# Altium PCB PCB2.PcbDoc
Units mm, origin at the board's own origin, x right, y up, seen from the top; angles counter-clockwise.
Board outline 32 x 57 mm, 2 copper layers (Top Layer, Bottom Layer), stack 1.671 mm thick; 11 components, 11 nets, 62 pads, 57 vias.
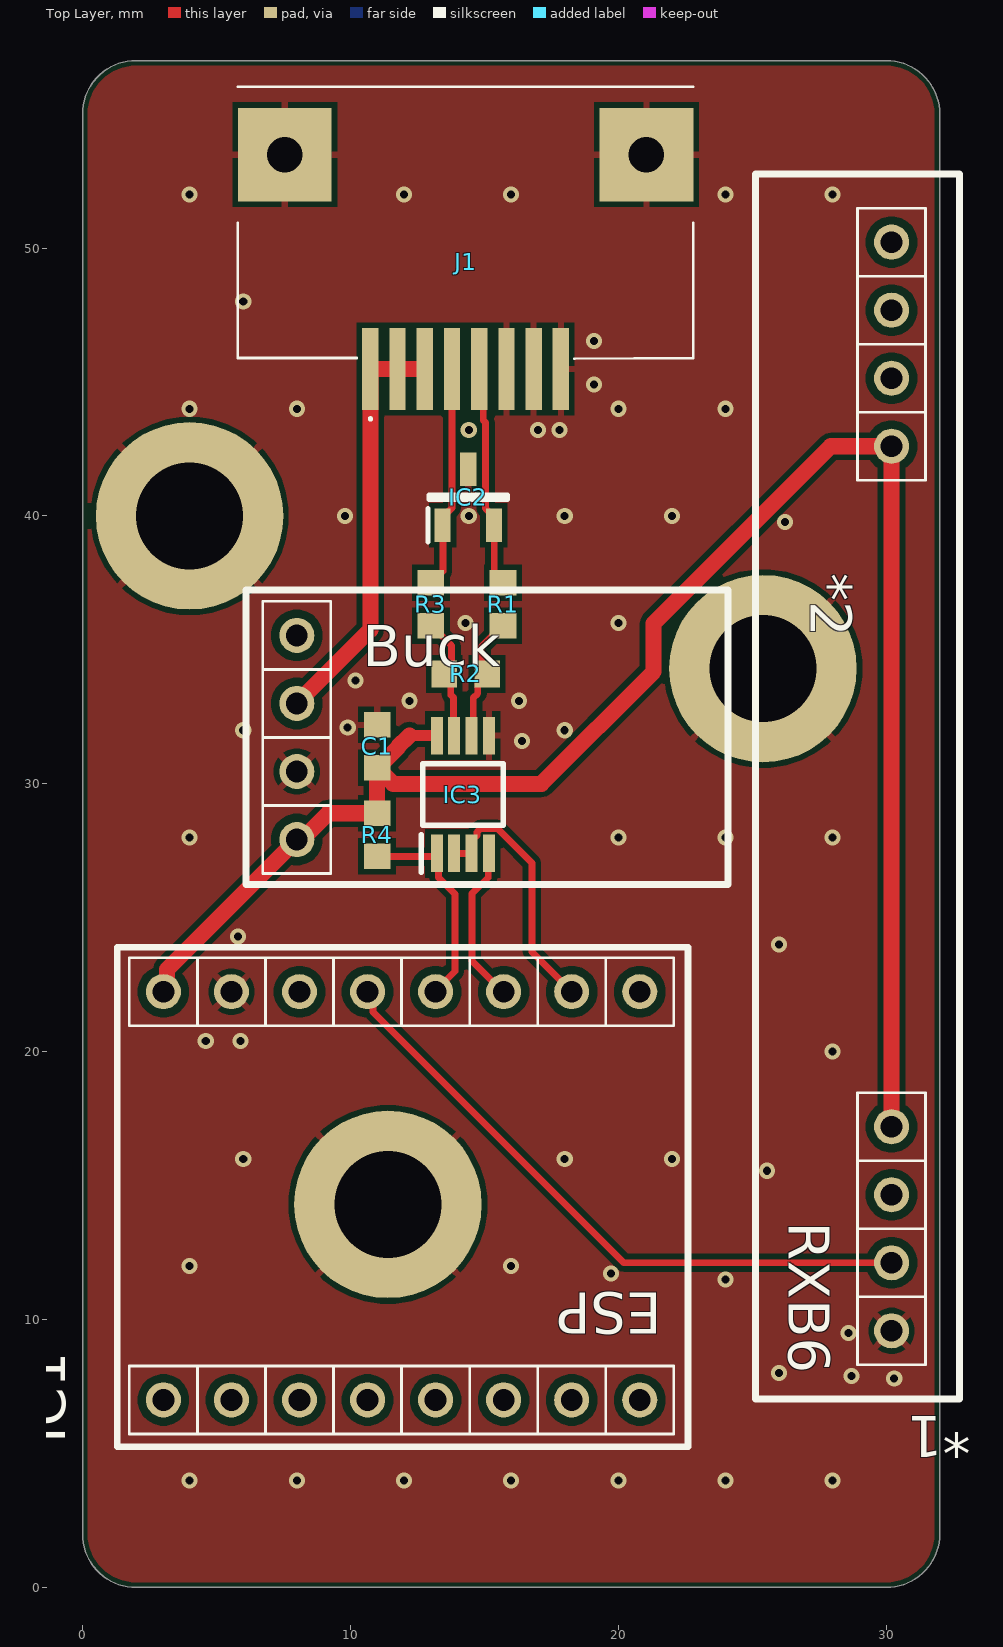
[diagram p0: Top Layer view]
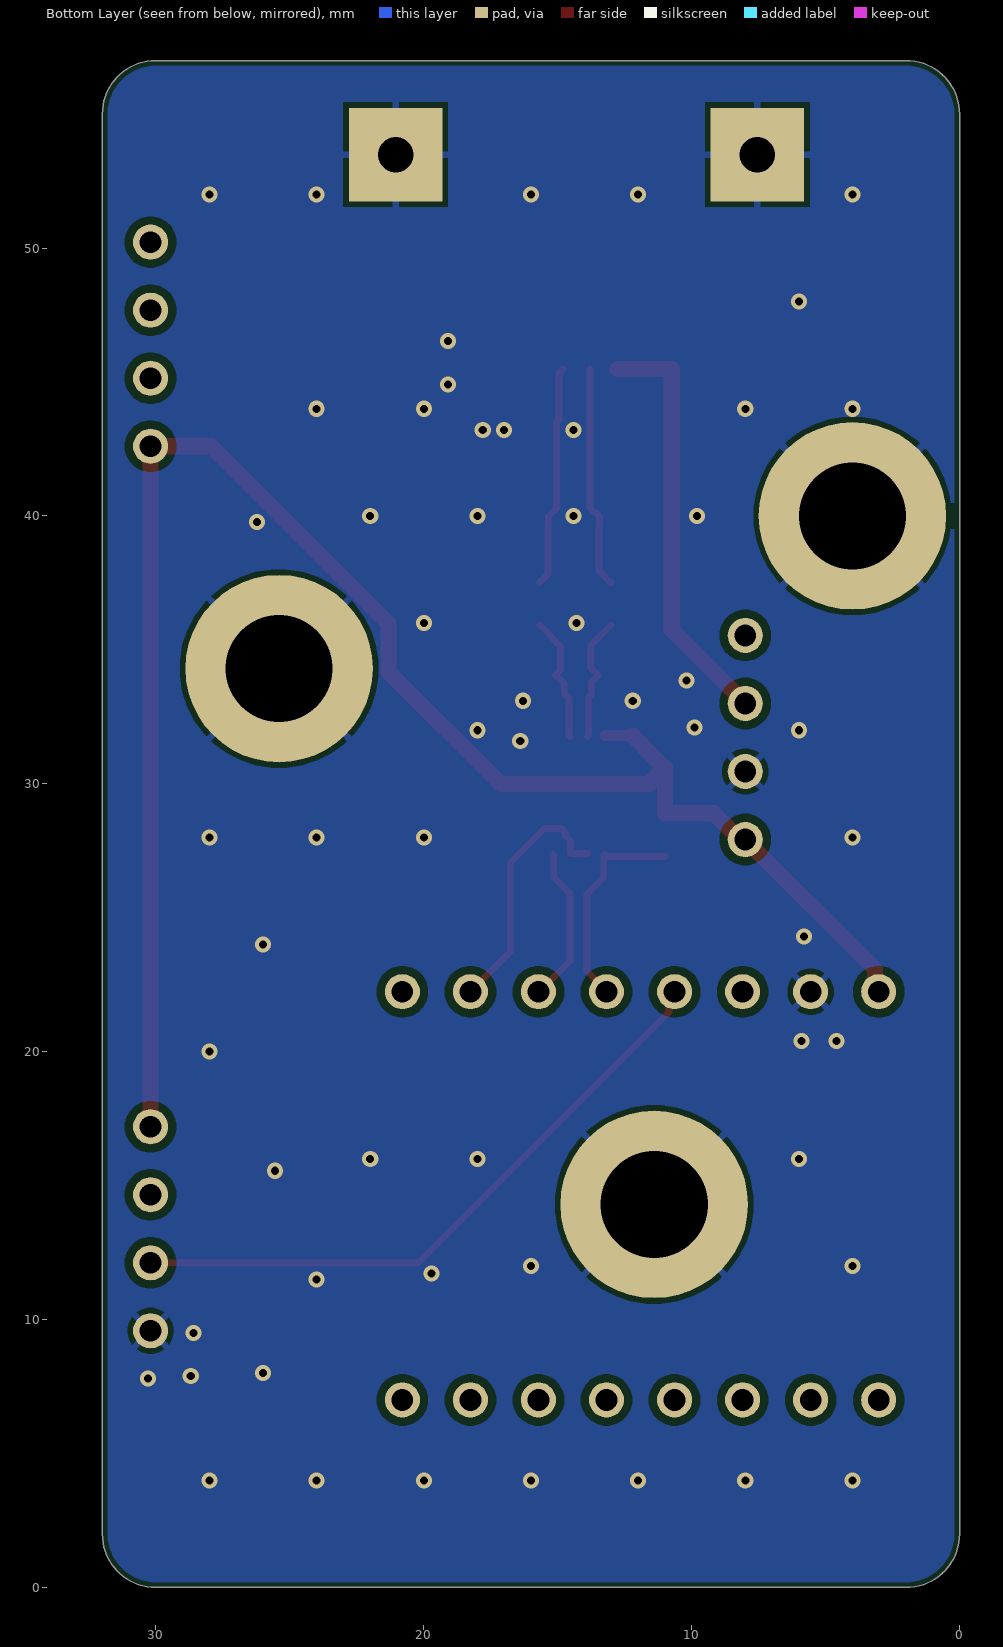
[diagram p1: Bottom Layer view, seen from below]
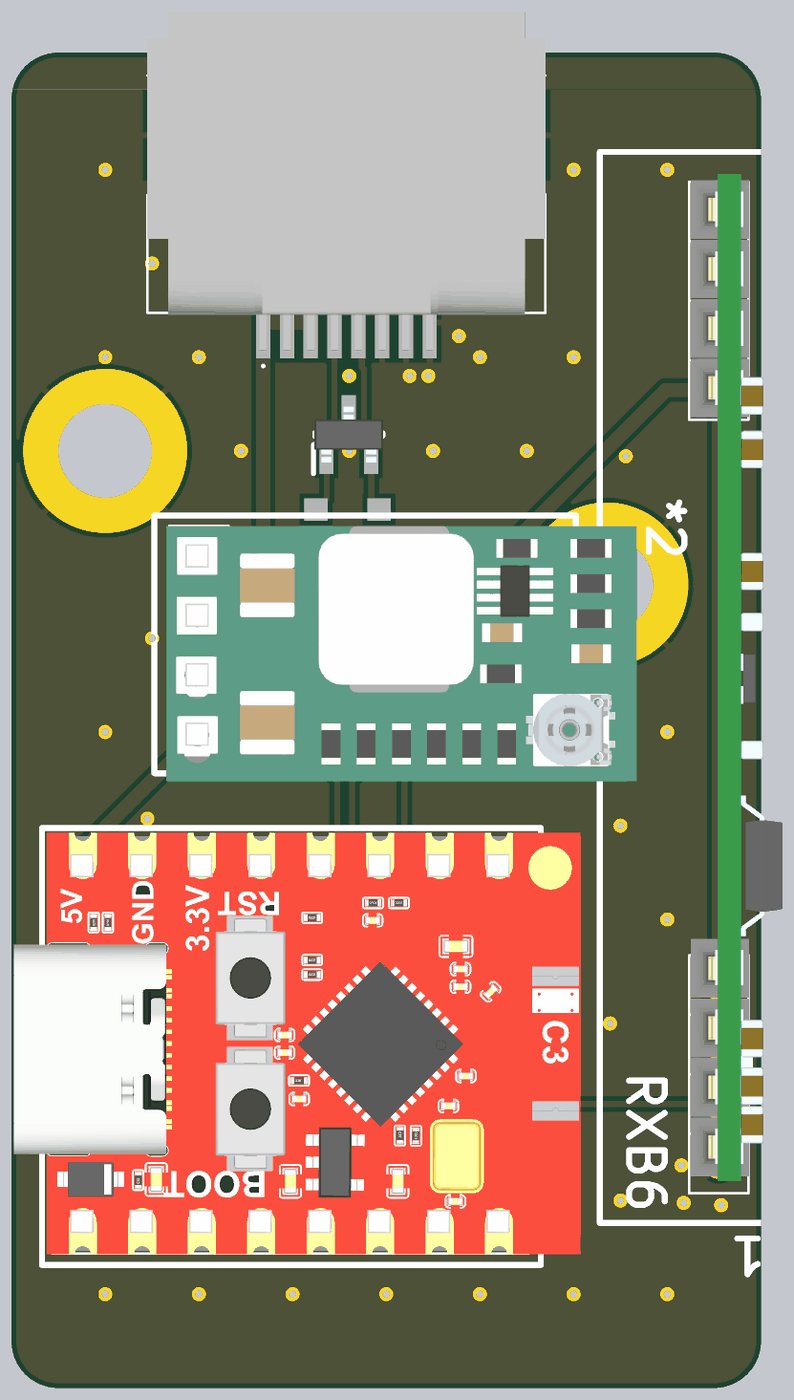
[diagram p2: 3D render of the assembled board from above, using the file's embedded part models]

## Layer stack, top to bottom
Top Solder: solder mask 0.0102, Solder Resist, Dk 3.5
Top Layer: signal copper 0.0356
Dielectric 1: dielectric 1.6, FR-4, Dk 4.8
Bottom Layer: signal copper 0.0356
Bottom Solder: solder mask 0.0102, Solder Resist, Dk 3.5

## Board outline
2,0 30,0 ccw(c30,2) 32,2 32,55 ccw(c30,55) 30,57 2,57 ccw(c2,55) 0,55 0,2 ccw(c2,2)

## Design rules (kind name [scope] priority, off if disabled: settings)
BoardOutlineClearance [All] p1: gap=0.2 ignorepadtopadclearanceinfootprint=FALSE except(0: Text-OutlineEdge Text-CavityEdge Text-CutoutEdge Text-SplitBarrior Text-SplitContinuation)
Clearance [All] p1: gap=0.2 ignorepadtopadclearanceinfootprint=FALSE except(0.1: Arc-SMDPad Track-SMDPad; 0.15: Arc-Arc Arc-Track Arc-Text Track-Track Track-Text SMDPad-SMDPad SMDPad-Text THPad-Text Via-Text Fill-Text Poly-Text Region-Text Text-Text; 0.28: Arc-THPad Track-THPad SMDPad-THPad; 0.3: THPad-THPad THPad-Via THPad-Fill THPad-Poly THPad-Region)
DiffPairsRouting [All] p1: maxlimit=0.4 minlimit=0.2 mostfreqgap=0.3 toplayer_minwidth=0.2 toplayer_maxwidth=0.4 toplayer_prefwidth=0.3 bottomlayer_minwidth=0.2 bottomlayer_maxwidth=0.4 bottomlayer_prefwidth=0.3 maxuncoupledlength=8
Height [All] p1: minheight=0 maxheight=30 prefheight=12.7
HoleSize [All] p1: absolutevalues=TRUE maxlimit=10 minlimit=0.15 maxpercent=80.000 minpercent=20.000
HoleToHoleClearance [All] p1: gap=0.45 allowstackedmicrovias=TRUE
MinimumAnnularRing [All] p1: minimumring=0.15
MinimumSolderMaskSliver [All] p1: minsoldermaskwidth=0.1
PlaneClearance [All] p1: clearance=0.2
PlaneConnect [All] p1: planeconnectstyle=Relief reliefexpansion=0.25 reliefentries=4 reliefconductorwidth=0.25 reliefairgap=0.2
PolygonConnect [All] p1: thpad.connectstyle=Relief thpad.reliefconductorwidth=0.25 thpad.reliefentries=4 thpad.polygonreliefangle="90 Angle" thpad.airgapwidth=0.2 thpad.conductorbypadedge=TRUE thpad.mindistance=0.381 thpad.enablemindistance=FALSE smdpad.connectstyle=Relief smdpad.reliefconductorwidth=0.25 smdpad.reliefentries=4 smdpad.polygonreliefangle="90 Angle" smdpad.airgapwidth=0.2 smdpad.conductorbypadedge=TRUE smdpad.mindistance=0.381 smdpad.enablemindistance=FALSE via.connectstyle=Direct via.reliefconductorwidth=0.25 via.reliefentries=4 via.polygonreliefangle="90 Angle" via.airgapwidth=0.2
RoutingVias [All] p1: holewidth=0.4 width=0.6 viastyle="Through Hole" minholewidth=0.15 minwidth=0.25 maxholewidth=6.3 maxwidth=1
SilkToSilkClearance [All] p1: silktosilkclearance=0
SilkToSolderMaskClearance [IsPad] p1: minsilkscreentomaskgap=0.1 clearancetoexposedcopper=TRUE
SolderMaskExpansion [All] p1: expansion=0 istentingtop=FALSE
SupplyNets "Schematic Supply Nets_3" [InNet('+3V3')] p1: voltage=0.000
SupplyNets "Schematic Supply Nets_2" [InNet('+12')] p2: voltage=0.000
SupplyNets "Schematic Supply Nets_1" [InNet('GND')] p3: voltage=0.000
UnRoutedNet [All] p1: checkbadconnections=TRUE
ViasUnderSMD [All] p1: allowed=TRUE
Width [All] p1: maxlimit=5 minlimit=0.15 preferedwidth=0.254
20 further rules are at their usual default settings.

## Components (designator, comment, footprint, x,y, rotation, side; value= is the part's Value field where it differs from the comment)
*1 "RXB6" RXB6 30.2,17.2 r270 top
*2 "Buck-Module" Buck-Module 8,35.54 r270 top
C1 "100nF/50V" Resistor 11,31.4 r90 top
IC1 "ESP32-C3-supermini" Esp32Module 20.8,7 r90 top
IC2 "NUP2105LT1G" SOT96P237X111-3N 14.4,40.7 r90 top
IC3 "SN65HVD72DGKR" SOP65P490X110-8N 14.2,29.6 r90 top
J1 "5406721-1" 54067211 14.3,49.8 r180 top
R1 "10" Resistor 15.7,36.7 r90 top
R2 "120" Resistor 14.3,34.1 r0 top
R3 "10" Resistor 13,36.7 r90 top
R4 "10k" Resistor 11,28.1 r90 top

## Footprints (in the part's own frame and the unit in brackets; to place one, negate y for a bottom-side part, rotate by r counter-clockwise, add the part's x,y. Pads: shape width x height; smd on the part's side, far side on the other; paste and mask are expansions set on the pad)
54067211 [mm]
  rect 0.61x3.05 smd: 1(3.556,4.315) 2(2.54,4.315) 3(1.524,4.315) 4(0.508,4.315) 5(-0.508,4.315) 6(-1.524,4.315) 7(-2.54,4.315) 8(-3.556,4.315)
  rect 3.5x3.5 hole 1.32: 9(-6.75,-3.685) 10(6.75,-3.685)
  silkscreen extent -8.5,-6.22 8.5,6.22, body extent -8.5,-8.96 8.5,5.51, height 12.44
Buck-Module [mm]
  round 1.31 hole 0.81: 1(0,0) 2(2.54,0) 3(5.08,0) 4(7.62,0)
  silkscreen extent -1.7,-1.9 9.3,16.1, body extent -1.25,-1.4 9.65,18.69, height 16.12
Esp32Module [mm]
  round 1.31 hole 0.81: 0(15.24,0) 1(15.24,2.54) 2(15.24,5.08) 3(15.24,7.62) 4(15.24,10.16) 5(0,17.78) 6(0,15.24) 7(0,12.7) 8(0,10.16) 9(0,7.62) 10(0,5.08) 11(15.24,17.78) 12(15.24,15.24) 13(15.24,12.7) 20(0,2.54) 21(0,0)
  silkscreen extent -1.75,-1.8 16.9,19.5, body extent -1.3,-3.5 16.7,20.7, height 15.36
Resistor [mm]
  rect 0.95x1 smd: 1(-0.8,0) 2(0.8,0)
  body extent -0.8,-0.4 0.8,0.4, height 0.25
RXB6 [mm]
  round 1.31 hole 0.81: 1(-33.02,0) 2(-30.48,0) 3(-27.94,0) 4(-25.4,0) 5(0,0) 6(5.08,0) 7(2.54,0) 8(7.62,0)
  silkscreen extent -35.56,-5.08 10.16,2.54, body extent -34.62,-1.2 8.38,2.7, height 20.68
SOP65P490X110-8N [mm]
  rect 1.4x0.45 smd: 1(-2.2,0.975) 2(-2.2,0.325) 3(-2.2,-0.325) 4(-2.2,-0.975) 5(2.2,-0.975) 6(2.2,-0.325) 7(2.2,0.325) 8(2.2,0.975)
  silkscreen extent -2.9,-1.5 1.15,1.55, body extent -2.45,-1.5 2.45,1.5, height 1.1
SOT96P237X111-3N [mm]
  rect 1.25x0.6 smd: 1(-1.05,0.955) 2(-1.05,-0.955) 3(1.05,0)
  silkscreen extent -1.68,-1.46 0.08,1.51, body extent -1.18,-1.46 1.18,1.46, height 1.11

## Part data
C1: library part "0603 cap"
IC2: "Integrated Circuit", Manufacturer_Name=onsemi, Mouser Part Number=863-NUP2105LT1G, Arrow Part Number=NUP2105LT1G, Arrow Price/Stock=https://www.arrow.com/en/products/nup2105lt1g/on-semiconductor?utm_currency=USD&region=europe, Datasheet Link=https://www.onsemi.com/pub/Collateral/NUP2105L-D.PDF, Height=1.11mm, Manufacturer_Part_Number=NUP2105LT1G, Mouser Price/Stock=https://www.mouser.co.uk/ProductDetail/onsemi/NUP2105LT1G?qs=ZXBb0xZ9WeDHmiHN%252BYKtYA%3D%3D
IC3: library part SN65HVD3085EDGKRG4, "Integrated Circuit", Manufacturer_Name="Texas Instruments", Datasheet Link=http://www.ti.com/lit/ds/symlink/sn65hvd3082e.pdf, Height=1.1mm, Manufacturer_Part_Number=SN65HVD3085EDGKRG4
J1: "Connector", Manufacturer_Name="TE Connectivity", Mouser Part Number=571-5406721-1, Arrow Part Number=5406721-1, Arrow Price/Stock=https://www.arrow.com/en/products/5406721-1/te-connectivity?region=nac, Datasheet Link=https://www.te.com/commerce/DocumentDelivery/DDEController?Action=srchrtrv&DocNm=82066_Mod_Jacks_and_MRJ21_Prod_-_Single&DocType=Catalog%20Section&DocLang=English&PartCntxt=5406721-1&DocFormat=pdf, Height=12mm, Manufacturer_Part_Number=5406721-1, Mouser Price/Stock=https://www.mouser.co.uk/ProductDetail/TE-Connectivity-AMP/5406721-1?qs=dJbzCyn%252BCFbR42PHIn9ZjQ%3D%3D
R1 R2 R3 R4: library part Resistor

## Free pads (board coordinates)
  round 7 hole 4 unplated paste-2539.97 mask-2539.97: 9(4,40) 9(11.4,14.3) 9(25.4,34.3)

## Via types
v1: diameter 0.6, hole 0.3, Top Layer to Bottom Layer, 57 vias

## Nets (pads, with @x,y where several pads share a name; then routed paths per layer and width w, separated by ;. In a path a pad name is that pad's centre, name@x,y a point inside that pad or via, vN(x,y) a via of type N, cw(c..) or ccw(c..) an arc to the next point about the centre after c; other vN are vias at no path point)
433_data: *1.6 IC1.4 | length 24.1
  Top Layer w0.254: IC1.4 10.842,22.038 10.842,21.485 20.207,12.12 *1.6
+3V3: *1.4 *1.5 *2.4 C1.1 IC1.11 IC3.8 R4.2 | length 66.7
  Top Layer w0.4: 12.2,31.8 IC3.8
  Top Layer w0.6: IC1.11 3.156,22.376 3.156,23.076 *2.4 8.192,27.92 9.172,28.9 R4.2 C1.1 C1.1@11.025,30.6 ; 12.2,31.8 11.776,31.376 11.776,31.351 C1.1@11.025,30.6 ; *1.5 *1.4 27.93,42.6 21.32,35.99 21.32,34.189 17.131,30 11.6,30 11.2,30.4 11.2,30.425 C1.1@11.025,30.6
+12: *2.2 J1.1 J1.2 J1.3 | length 15.7
  Top Layer w0.6: *2.2 10.744,35.744 J1.1 J1.2 J1.3
A: IC2.2 J1.5 R1.2 | length 8.3
  Top Layer w0.254: J1.5 14.958,45.335 14.958,43.579 15.046,43.49 15.046,40.284 15.355,39.975 IC2.2 ; IC2.2@15.368,39.606 15.368,37.834 R1.2@15.683,37.519
B: IC2.1 J1.4 R3.2 | length 8.3
  Top Layer w0.254: R3.2@13.016,37.519 13.041,37.519 13.458,37.936 IC2.1@13.458,39.606 ; IC2.1 13.445,39.975 13.618,40.148 13.643,40.148 13.792,40.297 J1.4
GND: *1.8 *2.3 C1.2 IC1.12 IC2.3 IC3.5 J1.6 J1.7 J1.8 J1.9 J1.10 pad.9
  other v1: 4,4 8,4 12,4 16,4 20,4 24,4 28,4 30.3,7.8 28.7,7.9 26,8 28.6,9.5 24,11.493 19.72,11.72 4,12 16,12 25.557,15.557 6,16 18,16 22,16 28,20 4.6,20.4 5.9,20.4 26,24 5.8,24.3 4,28 20,28 24,28 28,28 16.4,31.6 6,32 18,32 9.9,32.1 12.2,33.1 16.3,33.1 10.191,33.862 14.3,36 20,36 26.231,39.769 9.8,40 14.419,40 18,40 22,40 14.419,43.2 17,43.2 17.8,43.2 4,44 8,44 20,44 24,44 19.1,44.9 19.1,46.527 6,48 4,52 12,52 16,52 24,52 28,52
Mode: IC1.1 IC3.2 IC3.3 | length 9.6
  Top Layer w0.254: IC3.2 IC3.3 14.525,27.875 14.723,28.073 14.723,28.194 14.856,28.327 15.494,28.327 16.776,27.045 16.776,23.724 IC1.1
NetIC3_6: IC3.6 R1.1 R2.2 | length 4.8
  Top Layer w0.254: IC3.6@14.54,31.766 14.584,31.81 14.584,33.207 14.755,33.378 14.755,33.721 15.086,34.052 14.898,34.24 14.898,35.134 15.31,35.546 15.31,35.571 15.658,35.919 R1.1@15.683,35.919
NetIC3_7: IC3.7 R2.1 R3.1 | length 4.8
  Top Layer w0.254: R3.1@13.016,35.919 13.778,35.157 13.778,34.344 13.486,34.052 13.748,33.79 13.748,33.32 13.846,33.222 13.846,31.81 IC3.7@13.89,31.766
RxD: IC1.3 IC3.1 R4.1 | length 8
  Top Layer w0.254: R4.1@10.984,27.283 13.157,27.283 13.24,27.366 13.284,27.322 13.284,26.508 13.905,25.887 13.905,23.003 IC1.3@13.143,22.241
TxD: IC1.2 IC3.4 | length 5.9
  Top Layer w0.254: IC3.4@15.19,27.366 15.146,27.322 15.146,26.508 14.54,25.902 14.54,23.384 IC1.2@15.683,22.241
pads on no net: *1.1 *1.2 *1.3 *1.7 *2.1 IC1.0 IC1.5 IC1.6 IC1.7 IC1.8 IC1.9 IC1.10 IC1.13 IC1.20 IC1.21

## Polygon pours and split planes (outlines as drawn)
GND on Bottom Layer "NONET_L-01_P-001" (solid, pour order 2): 0,57.204 32,57.204 32,0.204 0,0.204
GND on Top Layer "GND_L01_P001" (solid, pour order 1): 0,57 32,57 32,0 0,0

## Silkscreen, mask and mechanical layers (free items; w line width, h text height)
Top Solder:
  circle w3.5: c25.4,34.3 r1.75
  circle w3.5: c4,40 r1.75
  circle w3.5: c11.4,14.3 r1.75
Bottom Solder:
  circle w3.5: c25.4,34.3 r1.75
  circle w3.5: c4,40 r1.75
  circle w3.5: c11.4,14.3 r1.75

## Text inside footprints (layer, text, board x,y; h text height)
*2: Top Overlay "Buck" at 10.454,34.394 h1.52
IC1: Top Overlay "ESP" at 21.621,10.996 h1.52 r180